# EAGLE board 00A-095-A (EAGLE 9.6.2)
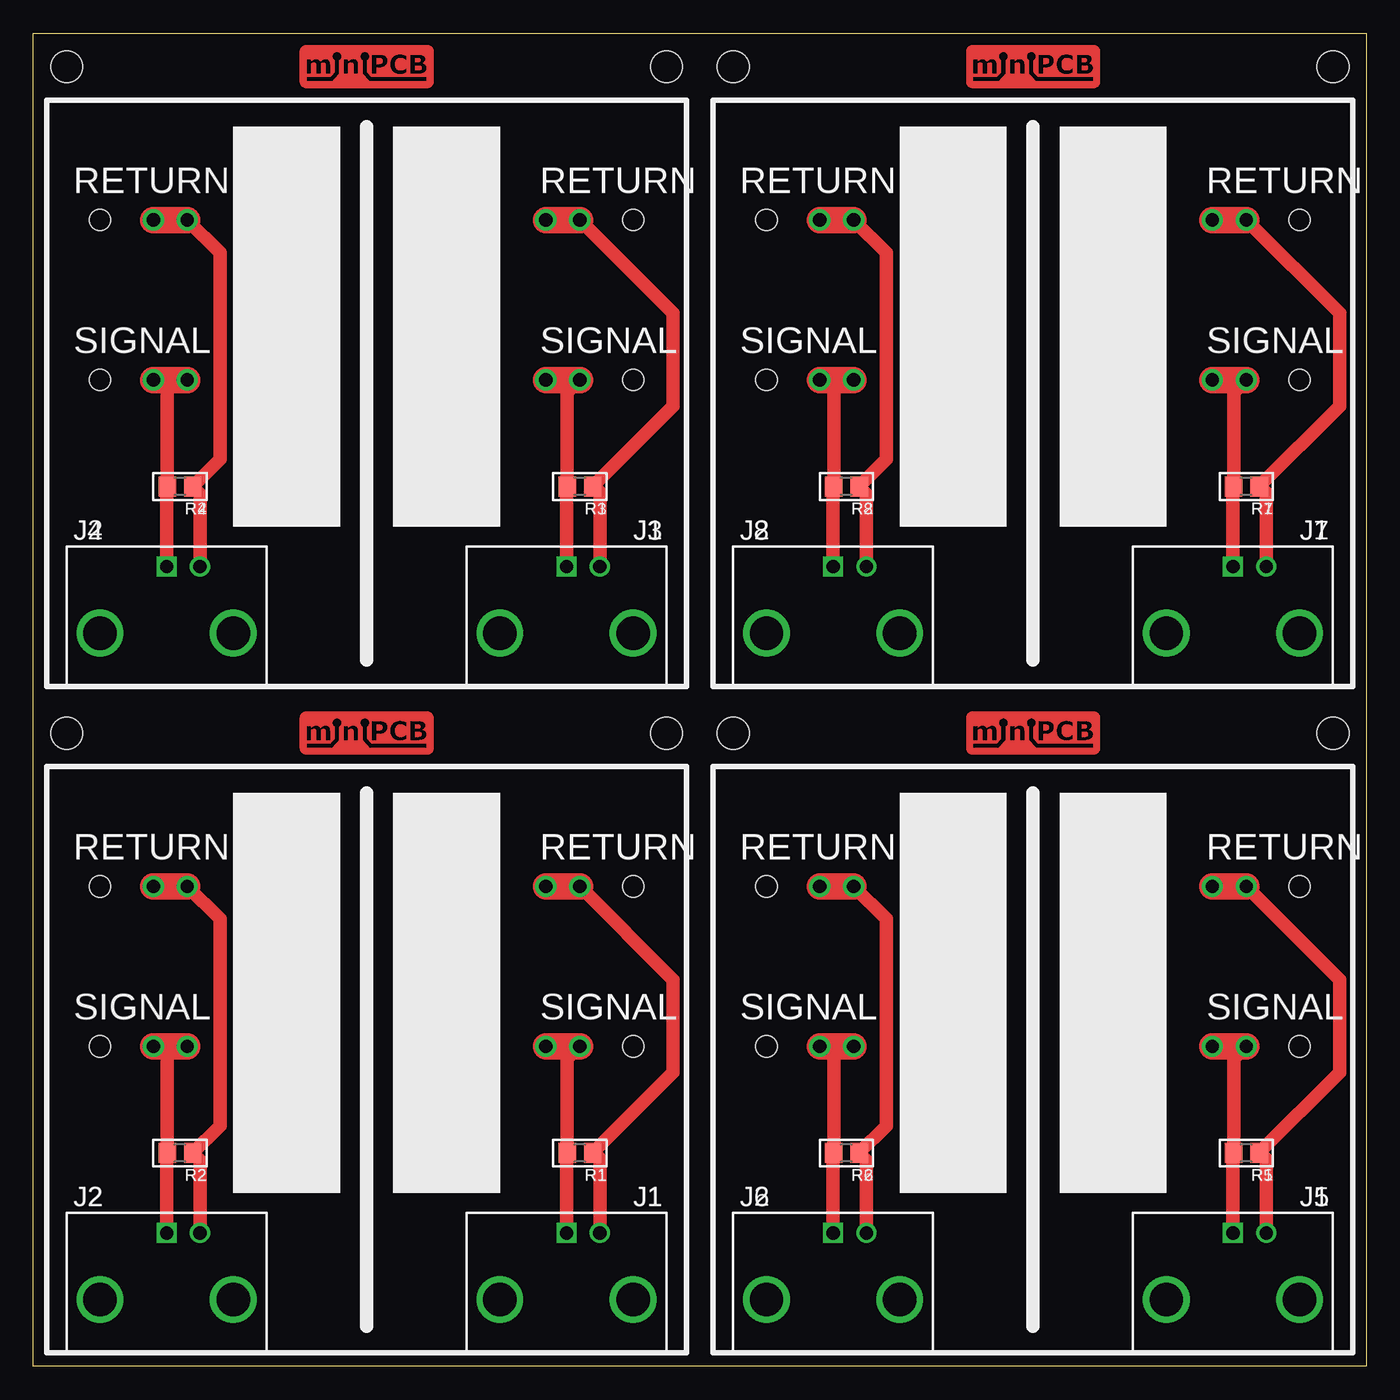
[diagram p0: board, top side]
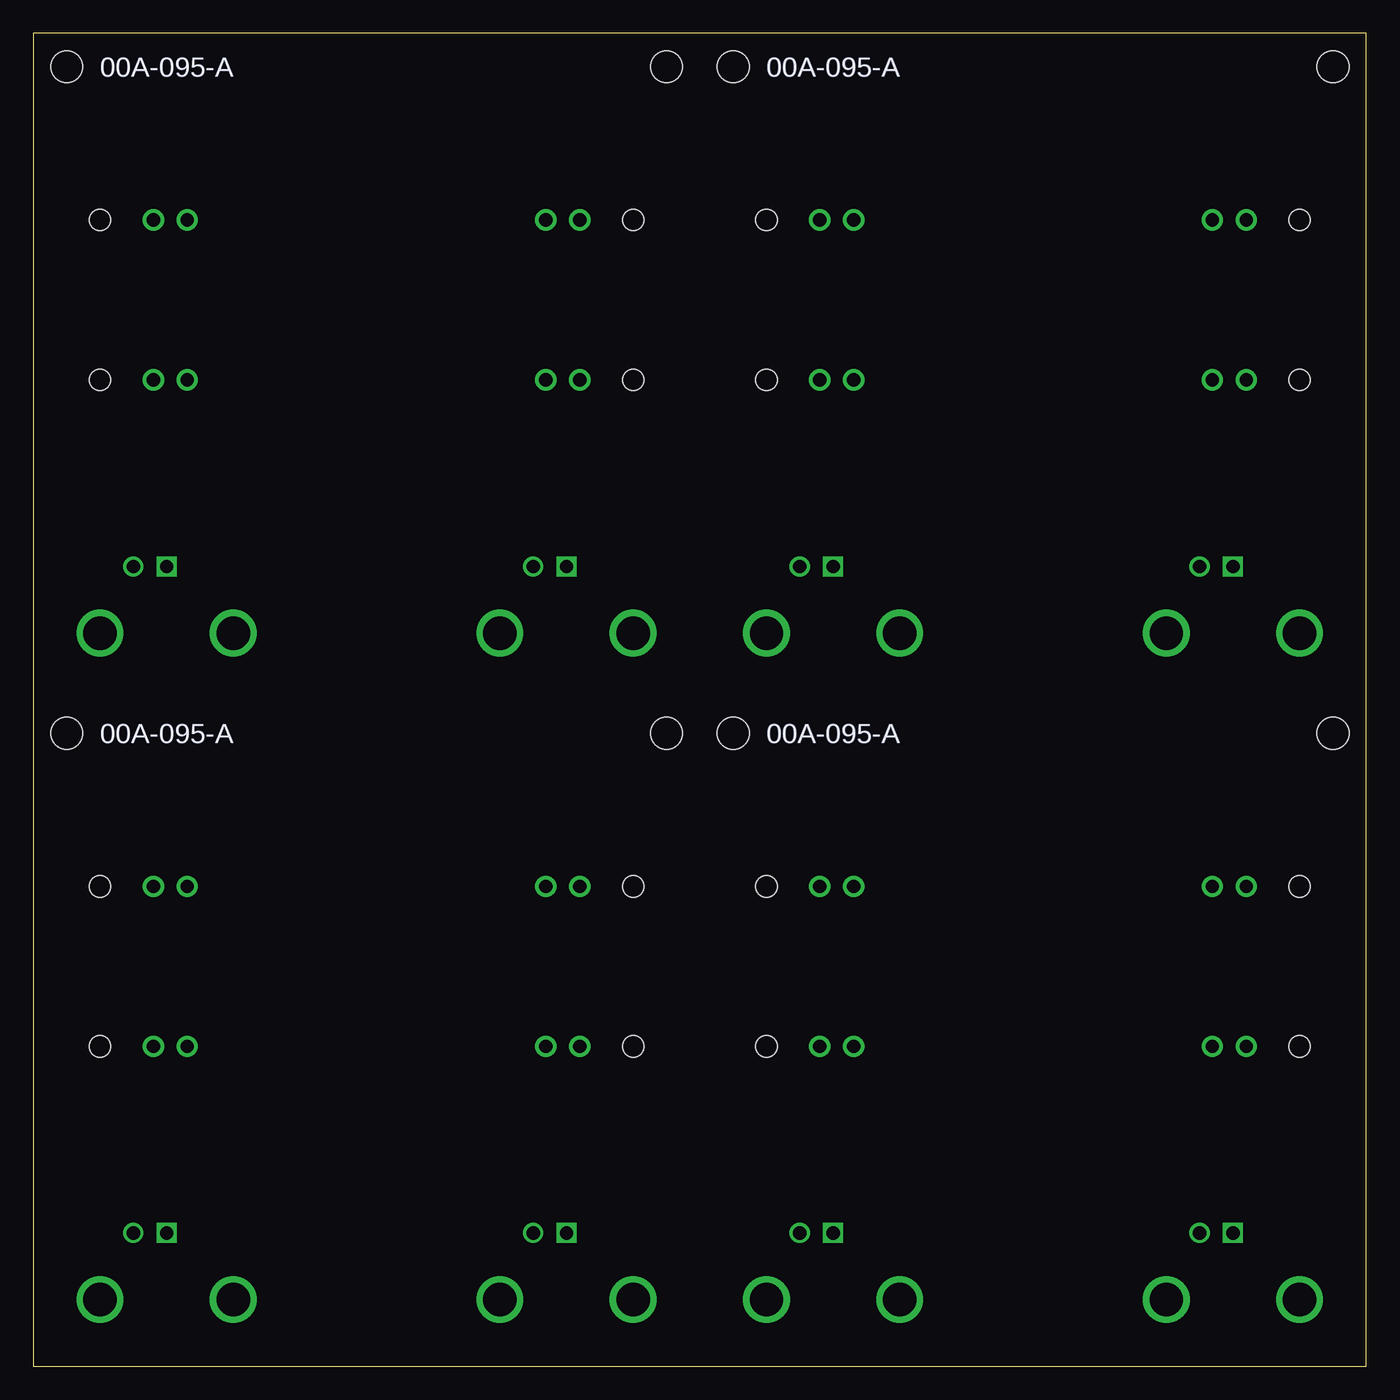
[diagram p1: board, bottom side, seen from below]

Size 100 x 100 mm. Coordinates in mm from the lower left corner, seen from the top.
Outline: 0,0 0,100 100,100 100,0 0,0
Copper layers (1*16): Top 0.035mm / dielectric 0.15mm / Bottom 0.035mm
Design rules "default": minimum track width 6mil, minimum drill 0.35mm, track to track 6mil, track to pad 6mil, pad to pad 6mil, via to via 6mil, smd to smd 6mil, copper to edge 40mil, drill to drill 6mil, minimum pad ring 10mil, minimum via ring 8mil, stop-mask expansion 4mil, vias tented up to drill 0mil, thermal gap 10mil

## Footprints (pad centres in the part's own frame; a part is rotated, then mirrored left to right if it is on the bottom)
BNC_RIGHTANGLE = drill 1 square: 1 0,0 | drill 1: 2 -2.5,0 | drill 2.5: 3 -5,5; 4 5,5
PINS_1_1MM-NOTEXT = drill 1 pad 1.6: 1 4,0; 2 6.54,0 | hole 1.6: 0,0
MINIPCB_0P_50X50MM = hole 2.4: 47.5,47.5; 2.5,47.5
R0805 = smd 1.3 x 1.5: 1 -0.95,0; 2 0.95,0

## Placement (x,y rotation side)
E$1  [MINIPCB_PANEL_IMAGEFRAME]  -25,-35 0 top  (outside the outline)
J1  [BNC_RIGHTANGLE]  40,10 180 top
J2  [BNC_RIGHTANGLE]  10,10 180 top
J3  [BNC_RIGHTANGLE]  40,60 180 top
J4  [BNC_RIGHTANGLE]  10,60 180 top
J5  [BNC_RIGHTANGLE]  90,10 180 top
J6  [BNC_RIGHTANGLE]  60,10 180 top
J7  [BNC_RIGHTANGLE]  90,60 180 top
J8  [BNC_RIGHTANGLE]  60,60 180 top
P1  [PINS_1_1MM-NOTEXT]  45,24 180 top
P2  [PINS_1_1MM-NOTEXT]  45,36 180 top
P3  [PINS_1_1MM-NOTEXT]  5,24 0 top
P4  [PINS_1_1MM-NOTEXT]  5,36 0 top
P5  [PINS_1_1MM-NOTEXT]  45,74 180 top
P6  [PINS_1_1MM-NOTEXT]  45,86 180 top
P7  [PINS_1_1MM-NOTEXT]  5,74 0 top
P8  [PINS_1_1MM-NOTEXT]  5,86 0 top
P9  [PINS_1_1MM-NOTEXT]  95,24 180 top
P10  [PINS_1_1MM-NOTEXT]  95,36 180 top
P11  [PINS_1_1MM-NOTEXT]  55,24 0 top
P12  [PINS_1_1MM-NOTEXT]  55,36 0 top
P13  [PINS_1_1MM-NOTEXT]  95,74 180 top
P14  [PINS_1_1MM-NOTEXT]  95,86 180 top
P15  [PINS_1_1MM-NOTEXT]  55,74 0 top
P16  [PINS_1_1MM-NOTEXT]  55,86 0 top
PCB1  [MINIPCB_0P_50X50MM]  0,0 0 top
PCB2  [MINIPCB_0P_50X50MM]  0,50 0 top
PCB3  [MINIPCB_0P_50X50MM]  50,0 0 top
PCB4  [MINIPCB_0P_50X50MM]  50,50 0 top
R1  100  [R0805]  41,16 180 top
R2  50  [R0805]  11,16 180 top
R3  100  [R0805]  41,66 180 top
R4  50  [R0805]  11,66 180 top
R5  100  [R0805]  91,16 180 top
R6  50  [R0805]  61,16 180 top
R7  100  [R0805]  91,66 180 top
R8  50  [R0805]  61,66 180 top

## Library data of the parts
E$1 J1-J8 P1-P16 R1-R8 = minipcb
PCB1-PCB4 = minipcb; PART_NUMBER: 00A-095-A; REVISION: A

## Nets
N$1: J2.1 P3.1 P3.2 R2.2
N$2: J2.2 P4.1 P4.2 R2.1
N$3: J1.1 P1.1 P1.2 R1.2
N$4: J1.2 P2.1 P2.2 R1.1
N$5: J4.1 P7.1 P7.2 R4.2
N$6: J4.2 P8.1 P8.2 R4.1
N$7: J3.1 P5.1 P5.2 R3.2
N$8: J3.2 P6.1 P6.2 R3.1
N$9: J6.1 P11.1 P11.2 R6.2
N$10: J6.2 P12.1 P12.2 R6.1
N$11: J5.1 P9.1 P9.2 R5.2
N$12: J5.2 P10.1 P10.2 R5.1
N$13: J8.1 P15.1 P15.2 R8.2
N$14: J8.2 P16.1 P16.2 R8.1
N$15: J7.1 P13.1 P13.2 R7.2
N$16: J7.2 P14.1 P14.2 R7.1

## Tracks (layer width: path | path; a pad name or v marks a point on that pad's centre or on a via)
N$1
  Top 1: J2.1 10,15.95 R2.2 10.05,23.95 10,24 P3.1
  Top 2: P3.2 P3.1
N$2
  Top 1: J2.2 12.5,15.45 R2.1 14,18.05 14,33.54 P4.2
  Top 2: P4.1 P4.2
N$3
  Top 1: J1.1 40,15.95 R1.2 40.05,23.05 P1.1
  Top 2: P1.2 P1.1
N$4
  Top 1: J1.2 42.5,15.55 42,16.05 R1.1 48,22.05 48,29 P2.1
  Top 2: P2.2 P2.1
N$5
  Top 1: J4.1 10,65.95 R4.2 10.05,73.95 10,74 P7.1
  Top 2: P7.2 P7.1
N$6
  Top 1: J4.2 12.5,65.45 R4.1 14,68.05 14,83.54 P8.2
  Top 2: P8.1 P8.2
N$7
  Top 1: J3.1 40,65.95 R3.2 40.05,73.05 P5.1
  Top 2: P5.2 P5.1
N$8
  Top 1: J3.2 42.5,65.55 42,66.05 R3.1 48,72.05 48,79 P6.1
  Top 2: P6.2 P6.1
N$9
  Top 1: J6.1 60,15.95 R6.2 60.05,23.95 60,24 P11.1
  Top 2: P11.2 P11.1
N$10
  Top 1: J6.2 62.5,15.45 R6.1 64,18.05 64,33.54 P12.2
  Top 2: P12.1 P12.2
N$11
  Top 1: J5.1 90,15.95 R5.2 90.05,23.05 P9.1
  Top 2: P9.2 P9.1
N$12
  Top 1: J5.2 92.5,15.55 92,16.05 R5.1 98,22.05 98,29 P10.1
  Top 2: P10.2 P10.1
N$13
  Top 1: J8.1 60,65.95 R8.2 60.05,73.95 60,74 P15.1
  Top 2: P15.2 P15.1
N$14
  Top 1: J8.2 62.5,65.45 R8.1 64,68.05 64,83.54 P16.2
  Top 2: P16.1 P16.2
N$15
  Top 1: J7.1 90,65.95 R7.2 90.05,73.05 P13.1
  Top 2: P13.2 P13.1
N$16
  Top 1: J7.2 92.5,65.55 92,66.05 R7.1 98,72.05 98,79 P14.1
  Top 2: P14.2 P14.1

## Text on the board
tPlace: RETURN | RETURN | RETURN | RETURN | SIGNAL | SIGNAL | SIGNAL | SIGNAL | RETURN | RETURN | RETURN | RETURN | SIGNAL | SIGNAL | SIGNAL | SIGNAL
_tNames: R2 | R1 | R2 | R1 | J2 | J1 | J2 | J1 | R2 | R1 | R2 | R1 | J2 | J1 | J2 | J1